# EAGLE board Team26_Final (EAGLE 8.0.0)
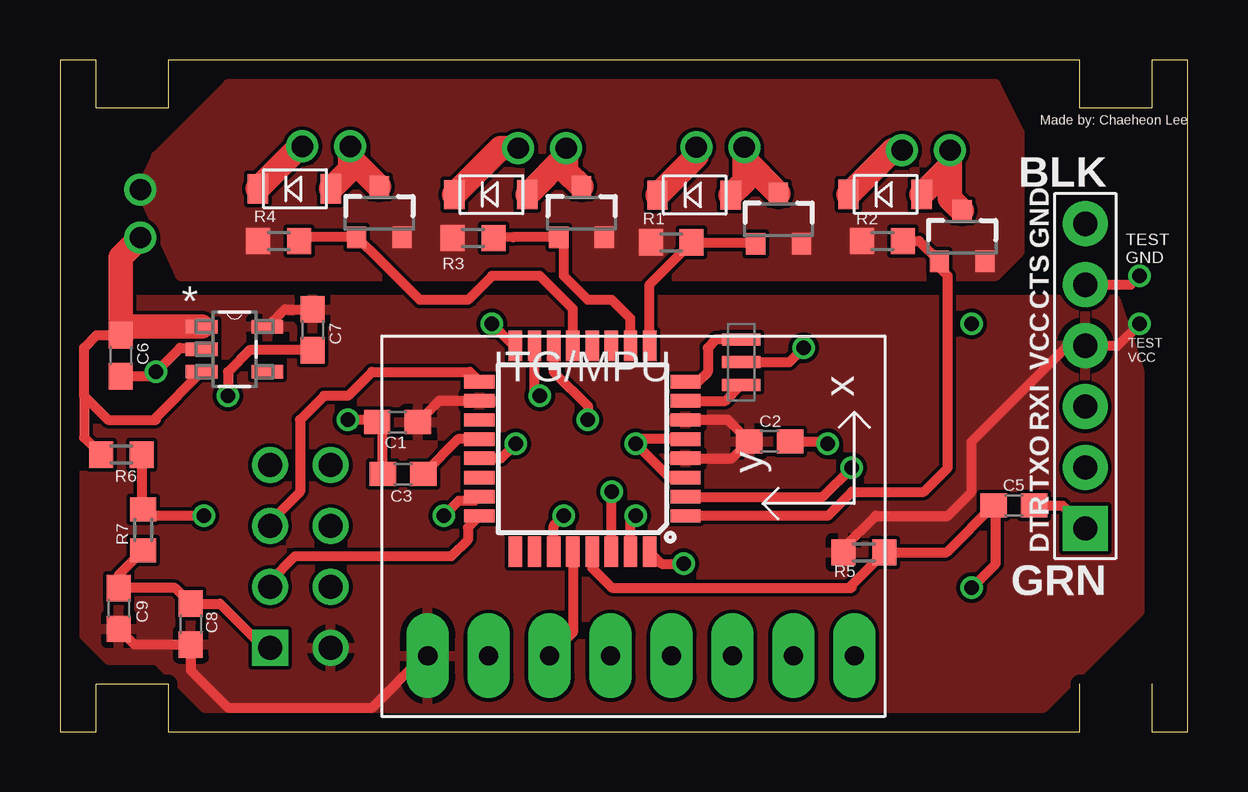
[diagram p0: board, top side]
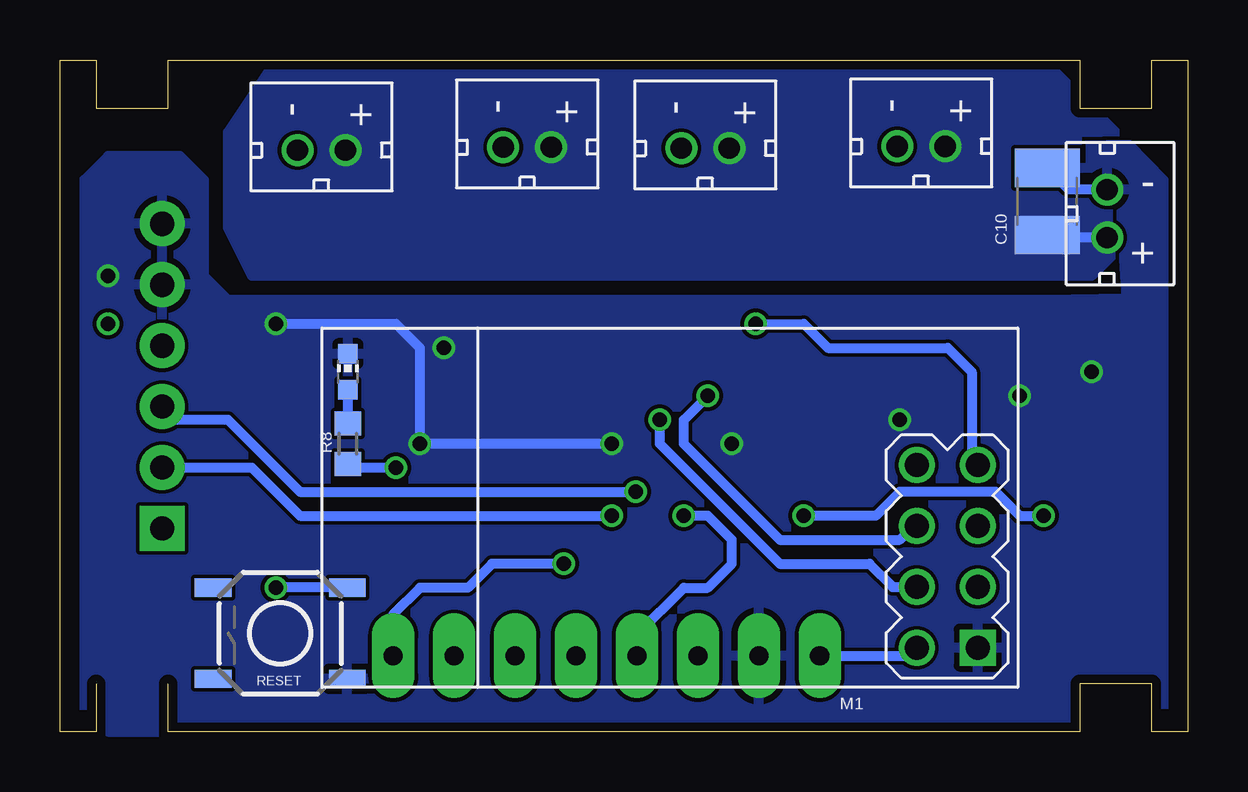
[diagram p1: board, bottom side, seen from below]

Size 47 x 28 mm. Coordinates in mm from the lower left corner, seen from the top.
Outline: 42.5,2 42.5,0 4.5,0 4.5,2 1.5,2 1.5,0 0,0 0,28 1.5,28 1.5,26 4.5,26 4.5,28 42.5,28 42.5,26 45.5,26 45.5,28 47,28 47,0 45.5,0 45.5,2
Copper layers (1*16): Top 0.0356mm / dielectric 1.5011mm / Bottom 0.0356mm
Design rules "LaenPCBOrder": minimum track width 6mil, minimum drill 13mil, track to track 6mil, track to pad 6mil, pad to pad 6mil, via to via 6mil, smd to smd 6mil, copper to edge 15mil, drill to drill 6mil, minimum pad ring 7mil, minimum via ring 7mil, stop-mask expansion 3mil, vias tented up to drill 0mil, thermal gap 10mil

## Footprints (pad centres in the part's own frame; a part is rotated, then mirrored left to right if it is on the bottom)
C0603 = smd 1.1 x 1: 1 -0.85,0; 2 0.85,0
C1210 = smd 1.6 x 2.7: 1 -1.4,0; 2 1.4,0
FTDI_DEVICE_SIDE = drill 1.016 pad 1.88 square: P$1 -6.35,0 | drill 1.016 pad 1.88: P$2 -3.81,0; P$3 -1.27,0; P$4 1.27,0; P$5 3.81,0; P$6 6.35,0
CHIP-LED0603 = smd 0.8 x 0.8: A 0,-0.75; C 0,0.75
WIRELESS-NRF24L01 = drill 1 square: 1 -12.7,6.35 | drill 1: 2 -10.16,6.35; 3 -12.7,3.81; 4 -10.16,3.81; 5 -12.7,1.27; 6 -10.16,1.27; 7 -12.7,-1.27; 8 -10.16,-1.27
JST_CONNECTOR_FEMALE = drill 0.889: + 0,1; - 0,-1
R0603 = smd 1 x 1.1: 1 -0.85,0; 2 0.85,0
SOT95P270X145-5N = smd 1.321 x 0.559: 1 -1.372,0.94; 2 -1.372,0; 3 -1.372,-0.94; 4 1.372,-0.94; 5 1.372,0.94
CSTCE16M0V53-R0 = smd 1.6 x 0.5: P$1 0,0.95; P$2 0,0; P$3 0,-0.95
TACTILE-SWITCH-SMD = smd 1.524 x 0.762: 1 -2.794,1.905; 2 2.794,1.905; 3 -2.794,-1.905; 4 2.794,-1.905
TQFP32-08 = smd 1.27 x 0.559: 1 -4.293,2.8; 2 -4.293,2; 3 -4.293,1.2; 4 -4.293,0.4; 5 -4.293,-0.4; 6 -4.293,-1.2; 7 -4.293,-2; 8 -4.293,-2.8; 17 4.293,-2.8; 18 4.293,-2; 19 4.293,-1.2; 20 4.293,-0.4; 21 4.293,0.4; 22 4.293,1.2; 23 4.293,2; 24 4.293,2.8 | smd 0.559 x 1.27: 9 -2.8,-4.293; 10 -2,-4.293; 11 -1.2,-4.293; 12 -0.4,-4.293; 13 0.4,-4.293; 14 1.2,-4.293; 15 2,-4.293; 16 2.8,-4.293; 25 2.8,4.293; 26 2,4.293; 27 1.2,4.293; 28 0.4,4.293; 29 -0.4,4.293; 30 -1.2,4.293; 31 -2,4.293; 32 -2.8,4.293
GY-521 = drill 0.8 pad 1.778 long: ADO -8.89,-6.35; GND -8.89,6.35; INT -8.89,-8.89; SCL -8.89,3.81; SDA -8.89,1.27; VCC -8.89,8.89; XCL -8.89,-3.81; XDA -8.89,-1.27
MINI2-F3-B = smd 1.22 x 0.85: NEG 0,1.55; POS 0,-1.5
SOT23-3 = smd 0.8 x 0.9: 1 -0.95,-1; 2 0.95,-1; 3 0,1.1

## Placement (x,y rotation side)
C1  100nF  [C0603]  14.07,12.9 180 top
C2  100nF  [C0603]  29.58,12.1 0 top
C3  100nF  [C0603]  14.3,10.74 180 top
C5  [C0603]  39.76,9.42 0 top
C6  1uF  [C0603]  2.53,15.67 270 top
C7  1uF  [C0603]  10.53,16.75 270 top
C8  10uF  [C0603]  5.45,4.48 270 top
C9  100nF  [C0603]  2.45,5.13 270 top
C10  100 uF  [C1210]  5.85,22.1 90 bottom
J1  FTDI_DEVICE  [FTDI_DEVICE_SIDE]  42.74,14.82 90 top
LED1  [CHIP-LED0603]  35,15 0 bottom
M1  WIRELESS-NRF24L01  [WIRELESS-NRF24L01]  21.45,9.84 180 bottom
MOTOR  JST_CONNECTOR_FEMALE  [JST_CONNECTOR_FEMALE]  27.52,24.36 270 bottom
MOTOR1  JST_CONNECTOR_FEMALE  [JST_CONNECTOR_FEMALE]  36.1,24.24 270 bottom
MOTOR2  JST_CONNECTOR_FEMALE  [JST_CONNECTOR_FEMALE]  20.1,24.32 270 bottom
MOTOR3  JST_CONNECTOR_FEMALE  [JST_CONNECTOR_FEMALE]  11.1,24.4 270 bottom
R1  10K  [R0603]  25.48,20.39 0 top
R2  10K  [R0603]  34.28,20.45 0 top
R3  10K  [R0603]  17.22,20.57 0 top
R4  10K  [R0603]  9.12,20.45 0 top
R5  10K  [R0603]  33.51,7.47 180 top
R6  1.2K  [R0603]  2.56,11.55 180 top
R7  806  [R0603]  3.47,8.41 90 top
R8  1K  [R0603]  35,12 90 bottom
REGULATOR  MCP1802T-3002I/OT  [SOT95P270X145-5N]  7.28,15.94 0 top
RES1  CSTCE-RESONATOR  [CSTCE16M0V53-R0]  28.39,15.4 0 top
RESET  SWITCH-MOMENTARY-2SMD  [TACTILE-SWITCH-SMD]  37.82,4.1 180 bottom
U1  ATMEGA328P_TQFP  [TQFP32-08]  21.78,11.79 180 top
U2  GY-521MPU6050  [GY-521]  24.22,12.05 90 top
U$1  DB2W40300L  [MINI2-F3-B]  34.42,22.4 90 top
U$2  DB2W40300L  [MINI2-F3-B]  26.46,22.37 90 top
U$3  DB2W40300L  [MINI2-F3-B]  17.98,22.39 90 top
U$4  DB2W40300L  [MINI2-F3-B]  9.8,22.63 90 top
U$5  N-CHANNEL-MOSFET-IRLML6244TRPBF  [SOT23-3]  37.6,20.61 0 top
U$6  N-CHANNEL-MOSFET-IRLML6244TRPBF  [SOT23-3]  29.95,21.33 0 top
U$7  N-CHANNEL-MOSFET-IRLML6244TRPBF  [SOT23-3]  21.74,21.61 0 top
U$8  N-CHANNEL-MOSFET-IRLML6244TRPBF  [SOT23-3]  13.31,21.61 0 top
U$9  JST_CONNECTOR_FEMALE  [JST_CONNECTOR_FEMALE]  3.35,21.59 180 bottom

## Library data of the parts
C1-C3 R5-R8 = resistor
C5-C10 R1-R4 = rcl
J1 M1 MOTOR MOTOR1-MOTOR3 RES1 U2 U$1-U$4 U$9 = quad (1)
LED1 = led
REGULATOR = quad (1); MPN: MCP1802T-3002I/OT; OC_FARNELL: 1578373; OC_NEWARK: 54M4837; PACKAGE: SOT-5; SUPPLIER: Microchip
RESET = quad (1); PROD_ID: SWCH-08247
U1 = quad (1); PROD_ID: IC-09069
U$5-U$8 = quad (1); DATASHEET: http://www.mouser.com/ds/2/196/irlml6244pbf-936666.pdf; MOUSER: 942-IRLML6244TRPBF; URL: http://www.mouser.com/Search/ProductDetail.aspx?R=IRLML6244TRPBFvirtualkey57370000virtualkey942-IRLML6244TRPBF

## Nets
7: RES1.P$3 U1.7
8: RES1.P$1 U1.8
29: C5.1 R5.1 RESET.3 U1.29
BAT: R6.1 R7.2 U1.23
BATTERY: C6.1 C10.1 MOTOR1.+ MOTOR2.+ MOTOR3.+ MOTOR.+ R6.2 REGULATOR.1 REGULATOR.3 U$1.NEG U$2.NEG U$3.NEG U$4.NEG U$9.+
CE: M1.3 U1.24
CSN: M1.4 U1.14
DTR: C5.2 J1.P$1
GND: C1.2 C2.2 C3.2 C6.2 C7.2 C8.1 C9.1 C10.2 J1.P$5 J1.P$6 LED1.C M1.1 R1.1 R2.1 R3.1 R4.1 R7.1 REGULATOR.2 RES1.P$2 RESET.1 U1.3 U1.5 U1.21 U2.GND U$5.2 U$6.2 U$7.2 U$8.2 U$9.-
INT: U1.32 U2.INT
MISO: M1.7 U1.16
MOSI: M1.6 U1.15
N$2: MOTOR.- U$2.POS U$6.3
N$10: LED1.A R8.2
N$11: C3.1 U1.20
N$12: R8.1 U1.2
N$14: MOTOR1.- U$1.POS U$5.3
N$15: MOTOR2.- U$3.POS U$7.3
N$16: MOTOR3.- U$4.POS U$8.3
PWM1: R2.2 U1.1 U$5.1
PWM2: R1.2 U1.9 U$6.1
PWM3: R3.2 U1.10 U$7.1
PWM4: R4.2 U1.13 U$8.1
RX: J1.P$3 U1.30
SCK: M1.5 U1.17
SCL: U1.28 U2.SCL
SDA: U1.27 U2.SDA
TX: J1.P$2 U1.31
VCC: C1.1 C2.1 C7.1 C8.2 C9.2 J1.P$4 M1.2 R5.2 REGULATOR.5 U1.4 U1.6 U1.18 U2.VCC

## Tracks (layer width: path | path; a pad name or v marks a point on that pad's centre or on a via)
7
  Top 0.406: U1.7 27.73,13.79 RES1.P$3
8
  Top 0.406: 27.83,16.35 RES1.P$1 27.35,16.35 27,16 27,15 26.59,14.59 U1.8
29  (via drill 0.6)
  Top 0.406: U1.29 22.18,6.82 23,6 33,6 33,6.11 R5.1 36.96,7.47 C5.1 39,9.33 39,7 v38,6
  Bottom 0.406: RESET.3 v37.99,6 v38,6
BAT  (via drill 0.6)
  Top 0.406: R6.1 3.41,9.32 R7.2 3.73,9 v6,9 | U1.23 17.29,9.63 16.63,9.63 v16,9
  Bottom 0.406: v16,9 13,9 12,10 8,10 7,9 v6,9
BATTERY
  Top 0.406: 2.6,16.59 C6.1 1.52,16.52 1,16 1,14 | 1,14 1,12.26 R6.2 | 5.91,14.91 REGULATOR.3 4,13.09 4,13 2,13 1,14
  Top 1.016: C6.1 2.89,16.88 REGULATOR.1 | C6.1 2.48,16.52 | C6.1 2.53,19.77 U$9.+ | MOTOR3.+ 10.02,24.4 U$4.NEG | MOTOR2.+ 18.36,24.32 U$3.NEG | MOTOR.+ 26.52,23.98 U$2.NEG | MOTOR1.+ 34.71,24.24 U$1.NEG
  Bottom 0.406: U$9.+ 5.74,20.59 C10.1
  pour Bottom (rank 2, no thermals): 2,24 2,21 4,19 39,19 40,21 40,25 38,28 6,28
CE
  Top 0.406: U1.24 17,8.5 17,8 16.32,7.32 9.8,7.32 8.75,6.26 M1.3
CSN  (via drill 0.6)
  Top 0.406: v22,13 22,13.58 20.58,15 U1.14
  Bottom 0.406: M1.4 12.29,6.03 13.26,7 17,7 22,12 v22,13
DTR
  Top 0.406: C5.2 41.79,9.42 J1.P$1
GND  (via drill 0.6)
  Top 0.406: C8.1 4.8,5.98 C9.1 2.45,6.54 R7.1 | C8.1 5.91,5.33 | C8.1 6.67,5.33 8.51,3.49 M1.1 | C6.2 3.82,14.82 v4,15 5,16 5.85,16 REGULATOR.2 | C2.2 31.9,12.1 v32,12 | RES1.P$2 30.4,15.4 v31,16 | U1.21 18.39,11.39 v19,12 | U1.5 24.19,12.19 v24,12 25.41,10.59 U1.3 | C7.2 7.9,15.9 7,15 v7,14 | v12,13 13.12,13 C1.2 13.45,12.67 C3.2 | J1.P$5 44.63,18.63 v45,19
  Bottom 0.406: v24,12 v32,12 32,16 33,17 v38,17 | U$9.- 4.94,22.59 C10.2
  pour Top (no thermals): 7,27 4,24 3.35,22.59 5,19 39,19 40,20 40,25 39,27
  pour Bottom: 1,23 2.43,24.48 5.27,24.4 5,23 2.81,22.03 2.55,18.05 6,18 40,18 41,19 41,23 42,24 45,24 46,23 46,1 45,0 2,0 1,1
INT  (via drill 0.6)
  Top 0.406: U1.32 25.08,7 v26,7
  Bottom 0.406: v26,7 29,7 30,6 32,6 33.11,4.89 U2.INT
MISO  (via drill 0.6)
  Top 0.406: U1.16 18.92,16.08 v18,17
  Bottom 0.406: M1.7 9,11.36 9,15 10,16 15,16 16,17 v18,17
MOSI  (via drill 0.6)
  Top 0.406: v20,14 19.78,14.22 U1.15
  Bottom 0.406: M1.6 11.43,8.57 12,8 17,8 21,12 21,13 v20,14
N$2
  Top 0.406: U$6.3 30.12,22.6
  Top 1.016: U$6.3 28.52,23.86 MOTOR.- 28.52,22.93 U$2.POS
N$10
  Bottom 0.406: R8.2 LED1.A
N$11
  Top 0.406: U1.20 16.6,12.19 C3.1
N$12  (via drill 0.6)
  Top 0.406: U1.2 31.79,9.79 v33,11
  Bottom 0.406: v33,11 34.85,11 R8.1
N$14
  Top 1.016: U$5.3 37.1,22.21 MOTOR1.- 37.1,23.58 U$1.POS
N$15
  Top 1.016: U$7.3 21.1,23.35 MOTOR2.- 21.1,24 U$3.POS
N$16
  Top 1.016: U$8.3 12.1,23.92 MOTOR3.- 12.1,23.43 U$4.POS
PWM1
  Top 0.406: U1.1 26.08,9 32,9 33,10 36,10 37,11 37,19 36.65,19.35 U$5.1 35.81,20.45 R2.2
PWM2
  Top 0.406: 29.12,20.21 U$6.1 28.94,20.39 R1.2 24.58,18.64 U1.9 24.58,16.58
PWM3
  Top 0.406: U1.10 23.78,17.22 23,18 22,18 21,19 21,20.4 U$7.1 18.89,20.61 R3.2
PWM4
  Top 0.406: U1.13 21.38,17.62 20,19 18,19 17,18 15,18 13.39,19.61 U$8.1 10.13,20.61 R4.2
RX  (via drill 0.6)
  Top 0.406: U1.30 22.98,9.98 v23,10
  Bottom 0.406: J1.P$3 42.19,13 40,13 37,10 v23,10
SCK
  Top 0.406: U1.17 17.08,15 13,15 12,14 11,14 10,13 10,10 8.75,8.75 M1.5
SCL
  Top 0.406: U1.28 21.38,4.13 U2.SCL
SDA  (via drill 0.6)
  Top 0.406: U1.27 20.58,8.58 v21,9
  Bottom 0.406: U2.SDA 22.95,4.05 21,6 20,6 19,7 19,8 20,9 v21,9
TX  (via drill 0.6)
  Top 0.406: U1.31 23.78,8.78 v24,9
  Bottom 0.406: J1.P$2 39.01,11.01 37,9 v24,9
VCC  (via drill 0.6)
  Top 0.406: C9.2 3.1,3.63 C8.2 5.45,2.55 7,1 13,1 15.16,3.16 U2.VCC | REGULATOR.5 9.37,17.6 C7.1 | U1.6 27.84,12.99 C2.1 28.02,11.39 U1.4 | R5.2 32.66,7.66 34,9 37,9 38,10 38,12.09 42,16.09 J1.P$4 44.09,16.09 v45,17 | U1.18 15.81,13.79 C1.1
  Bottom 0.406: U2.VCC 11.62,3.16 M1.2
  pour Top: 44,18 2,18 1,16 1,4 2,3 4,3 6,1 41,1 45,5 45,15

## Text on the board
tPlace: Made by: Chaeheon Lee | TEST / GND | TEST / VCC